# Altium PCB TEG_ver4_PCB1.PcbDoc
Units mil, origin at the board's own origin, x right, y up, seen from the top; angles counter-clockwise.
Board outline 1740.03 x 890.03 mil, 2 copper layers (Top Layer, Bottom Layer); 12 components, 13 nets, 44 pads, 0 vias.
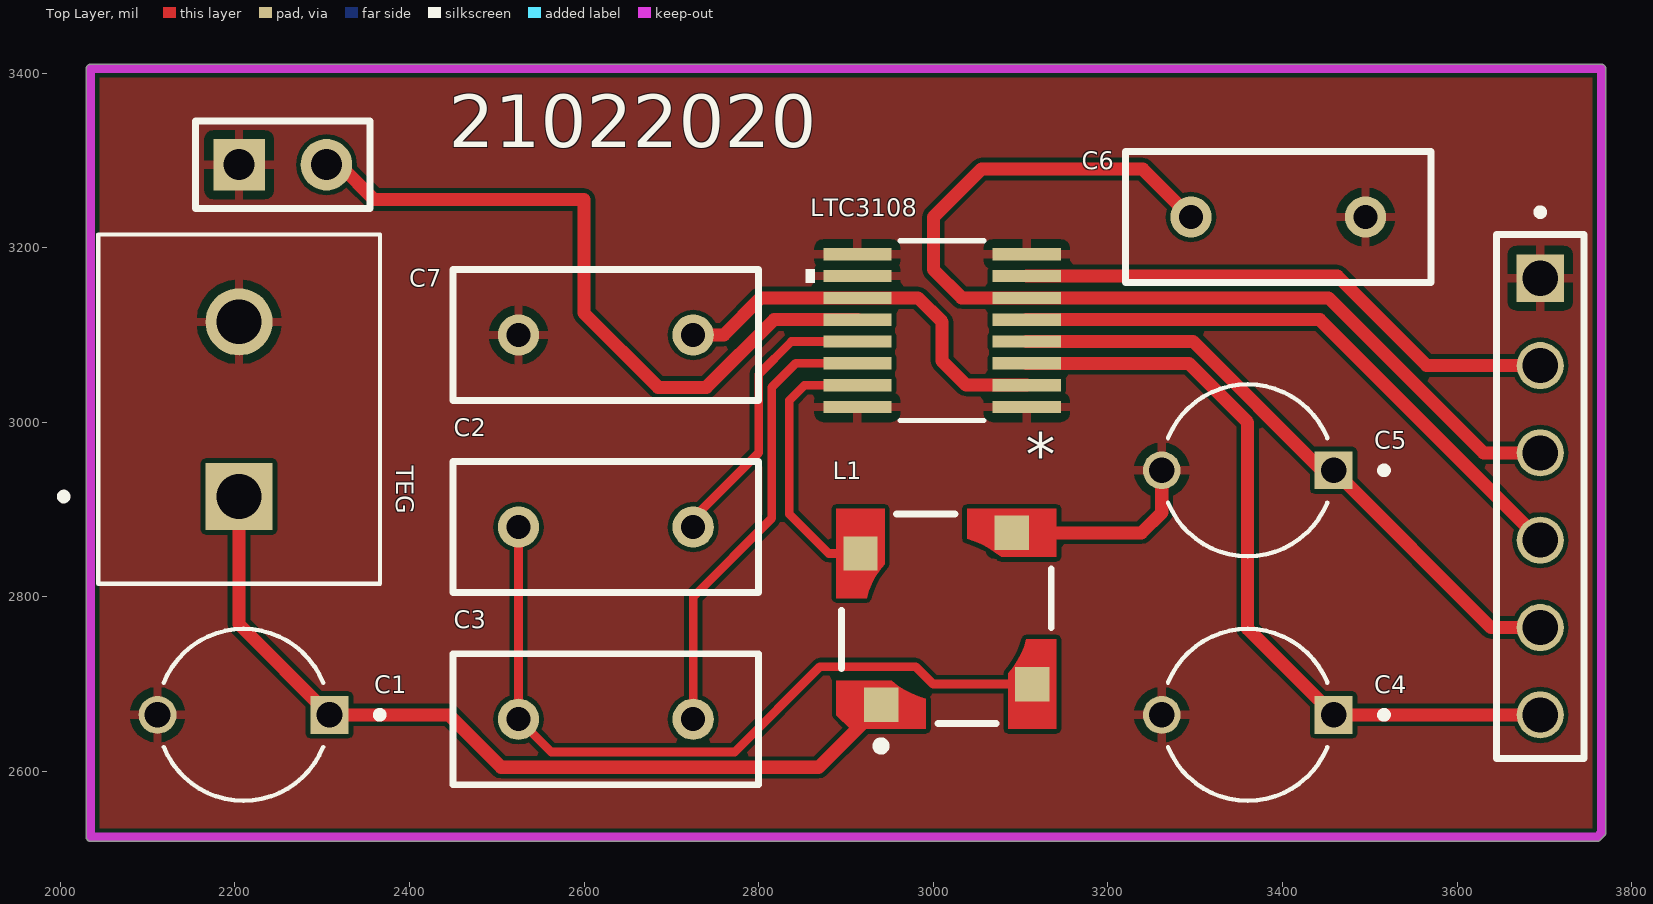
[diagram p0: Top Layer view]
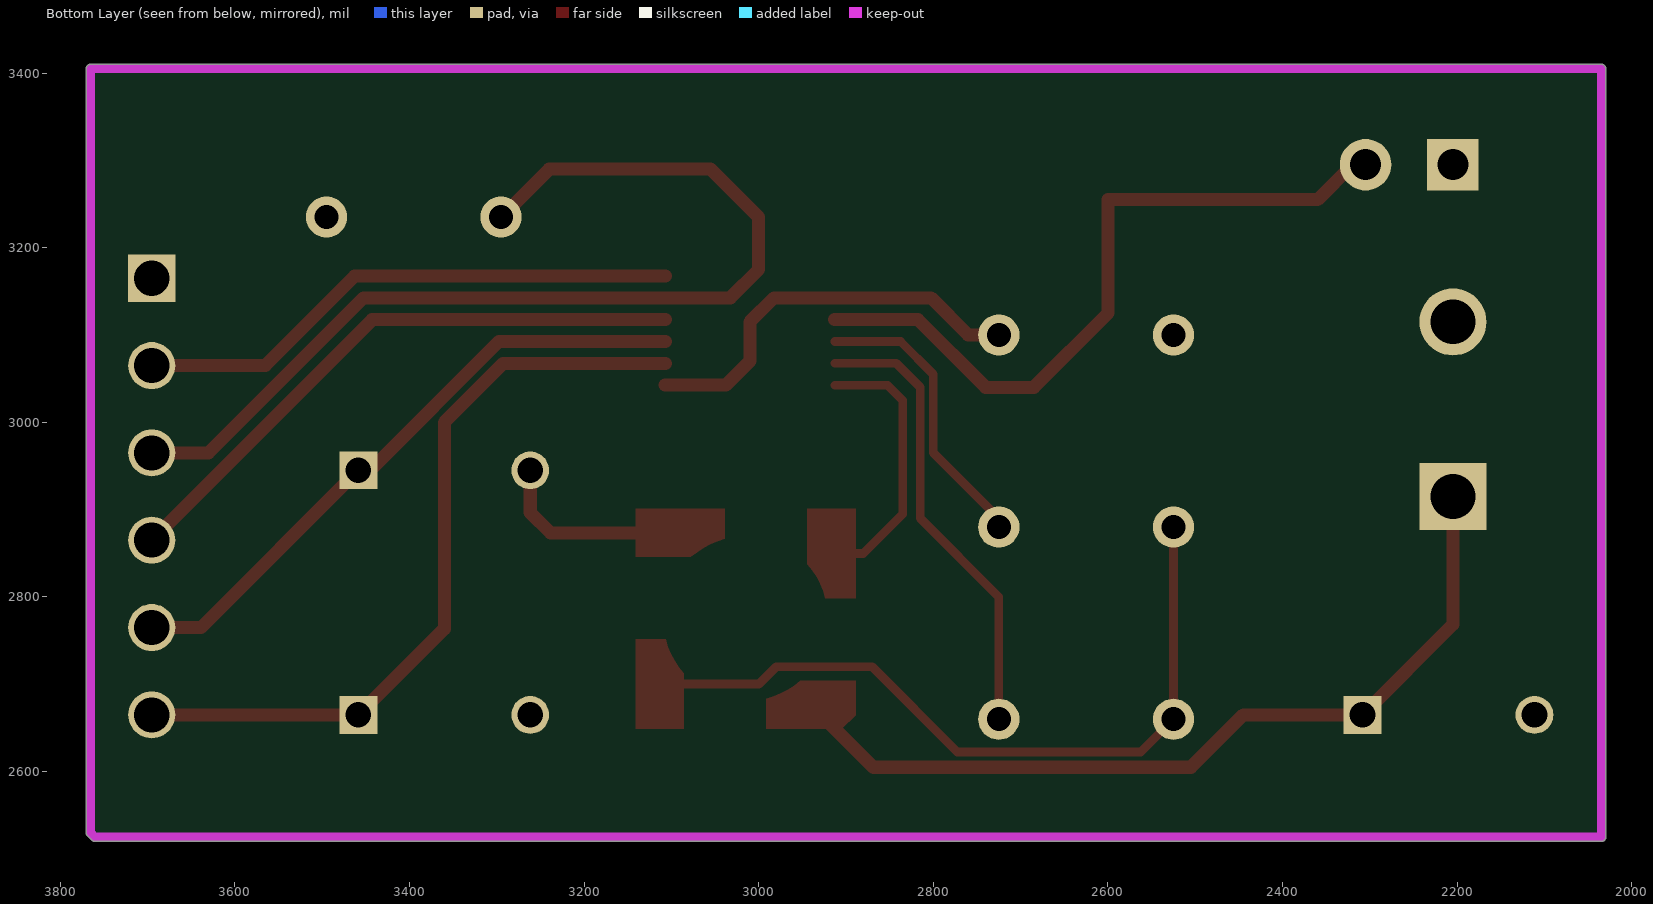
[diagram p1: Bottom Layer view, seen from below]
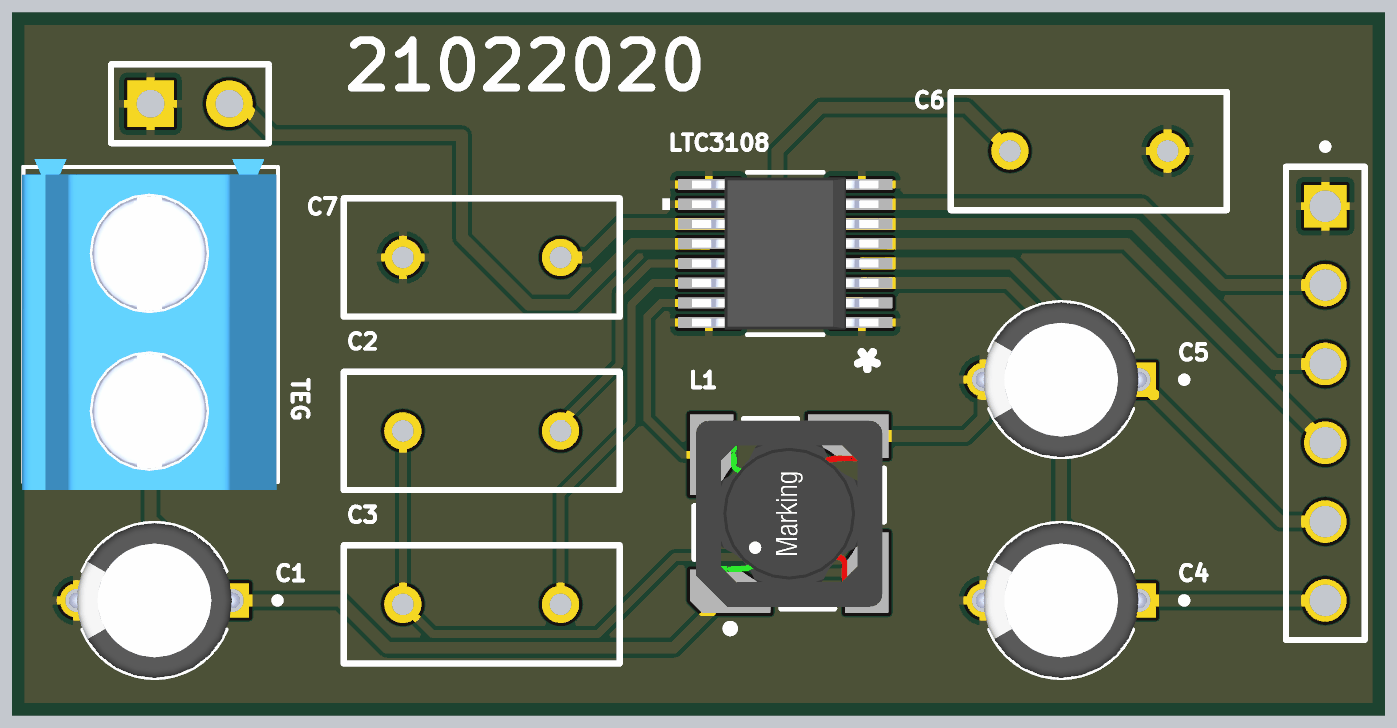
[diagram p2: 3D render of the assembled board from above, using the file's embedded part models]

## Layer stack, top to bottom
Top Solder: solder mask 0.4, Solder Resist, Dk 3.5
Top Layer: signal copper 1.4
Dielectric 1: dielectric 12.6, FR-4, Dk 4.8
Bottom Layer: signal copper 1.4
Bottom Solder: solder mask 0.4, Solder Resist, Dk 3.5

## Board outline
2035,2519.99 cw(c2035,2525) 2029.98,2525 2029.98,3405 cw(c2035,3405) 2035,3410.01 3765,3410.01 cw(c3765,3405) 3770.01,3405 3770.01,2530 cw(c3765,2530) 3768.53,2526.44 3768.55,2526.45 3763.55,2521.45 3763.56,2521.47 cw(c3760,2525) 3760,2519.99

## Design rules (kind name [scope] priority, off if disabled: settings)
Clearance [All] p1: gap=5 ignorepadtopadclearanceinfootprint=FALSE
PolygonConnect [All] p1: connectstyle=Relief reliefconductorwidth=10 reliefentries=4 polygonreliefangle="90 Angle" airgapwidth=10
RoutingVias [All] p1: holewidth=28 width=50 viastyle="Through Hole" minholewidth=28 minwidth=50 maxholewidth=28 maxwidth=50
SolderMaskExpansion [All] p1: expansion=4
Width signals [InNetClass('signals')] p1: maxlimit=10 minlimit=10 preferedwidth=10
Width power [InNetClass('power')] p2: maxlimit=15 minlimit=10 preferedwidth=15
30 further rules are at their usual default settings.

## Classes and differential pairs
net class signals: C1 C2 NetC2_1 SW
net class power: GND IN PGD VAUX VLDO VOUT VOUT2 VOUT2_EN VSTORE
component class TEG_ver4_sheet1: C1 C2 C3 C4 C5 C6 C7 L1 LTC3108 TEG

## Components (designator, comment, footprint, x,y, rotation, side; value= is the part's Value field where it differs from the comment)
C1 "220uF" CAPPRD500W50D500H1100 2210,2665 r180 top
C2 "Cap" RAD-0.2 2625,2880 r0 top value=1nF
C3 "Cap" RAD-0.2 2625,2660 r0 top value=330pF
C4 "220uF" CAPPRD500W50D500H1100 3360,2665 r180 top
C5 "220uF" CAPPRD500W50D500H1100 3360,2945 r180 top
C6 "Cap" RAD-0.2 3395,3235 r0 top value=2.2uF
C7 "Cap" RAD-0.2 2625,3100 r180 top value=2.2uF
J1 "Header 2" HDR1X2 2205,3295 r0 top
J2 "MTSW-106-09-G-S-250" SAMTEC_MTSW-106-09-G-S-250 3695,2915 r90 top
L1 "7µH / 70000µH" WE-EHPI_5838 3015,2775 r90 top
LTC3108 "LTC3108IGN#PBF" SSOP-16_GW 3010,3105 r180 top
TEG "TB006-508-02BE" CUI_TB006-508-02BE 2205,2915 r90 top

## Footprints (in the part's own frame and the unit in brackets; to place one, negate y for a bottom-side part, rotate by r counter-clockwise, add the part's x,y. Pads: shape width x height; smd on the part's side, far side on the other; paste and mask are expansions set on the pad)
CAPPRD500W50D500H1100 [mm]
  round 1.1 hole 0.75: N(2.5,0)
  rect 1.1x1.1 hole 0.75: P(-2.5,0)
  silkscreen extent -4.06,-2.5 2.32,2.5, body extent -2.75,-2.5 2.75,2.5, height 11
CUI_TB006-508-02BE [mm]
  rect 1.95x1.95 / inner round 1.95 / far side rect 1.95x1.95 hole 1.3: 1(0,0)
  round 1.95 hole 1.3: 2(5.08,0)
  silkscreen extent -2.54,-4.1 7.62,5.2, body extent -2.79,-4.06 7.87,4.14, height 10
HDR1X2 [mm] "Connector; Header; 2 Position"
  rect 1.5x1.5 hole 0.9: 1(0,0)
  round 1.5 hole 0.9: 2(2.54,0)
  silkscreen extent -1.27,-1.27 3.81,1.27
RAD-0.2 [mm] "Radial Cap, Thru-Hole; 2 Leads; 0.2 in Pin Spacing"
  round 1.2 hole 0.7: 1(-2.54,0) 2(2.54,0)
  silkscreen extent -4.44,-1.91 4.44,1.91
SAMTEC_MTSW-106-09-G-S-250 [mm]
  rect 1.37x1.37 / inner round 1.37 / far side rect 1.37x1.37 hole 1.02: 01(6.35,0)
  round 1.37 hole 1.02: 02(3.81,0) 03(1.27,0) 04(-1.27,0) 05(-3.81,0) 06(-6.35,0)
  silkscreen extent -7.62,-1.27 8.37,1.27
SSOP-16_GW [mil]
  rect 78x14 smd: 1(-97,87.5) 2(-97,62.5) 3(-97,37.5) 4(-97,12.5) 5(-97,-12.5) 6(-97,-37.5) 7(-97,-62.5) 8(-97,-87.5) 9(97,-87.5) 10(97,-62.5) 11(97,-37.5) 12(97,-12.5) 13(97,12.5) 14(97,37.5) 15(97,62.5) 16(97,87.5)
  silkscreen extent -48,-103 156,103, body extent -118,-96 118,96, height 69
WE-EHPI_5838 [mm] "Power Inductor 4-Leads, SMD, Body 6x6mm"
  rect 1x1 smd paste-403.566 mask-403.566: 1(-2.5,1.9) 2(1.9,2.5) 3(2.5,-1.9) 4(-1.9,-2.5)
  Top Layer region: -3.2,0.6 -3.2,2.8 -2.8,3.2 -1.8,3.2 -1.8,1.588 -1.8,1.587 -2.12,1.125 -2.324,0.6 -2.324,0.6 -2.324,0.6
  Top Layer region: -0.6,-3.2 -3.2,-3.2 -3.2,-1.8 -1.588,-1.8 -1.125,-2.12 -0.6,-2.324 -0.6,-2.324
  Top Layer region: 3.2,-0.6 3.2,-3.2 1.8,-3.2 1.8,-1.588 2.12,-1.125 2.324,-0.6 2.324,-0.6
  Top Layer region: 0.6,3.2 3.2,3.2 3.2,1.8 1.588,1.8 1.125,2.12 0.6,2.324 0.6,2.324
  silkscreen extent -3.82,-3.05 3.05,3.05, body extent -3,-3 3,3, height 4

## Part data
C1 C4 C5: library part EEUFS0J221B, "Aluminum Electrolytic Capacitors, 220uF, 6.3V, -40 to 105C", Package="RADIAL-2 Panasonic", =220uF, Availability="In Stock", Check_prices=https://www.snapeda.com/parts/EEUFS0J221B/Panasonic/view-part/5796863/?ref=eda, MF=Panasonic, MP=EEUFS0J221B, Price=None, Purchase-URL=https://pricing.snapeda.com/search/part/EEUFS0J221B/?ref=eda, SnapEDA_Link=https://www.snapeda.com/parts/EEUFS0J221B/Panasonic/view-part/5796863/?ref=snap
C2 C3 C6 C7: "Capacitor", LatestRevisionDate=17-Jul-2002, LatestRevisionNote="Re-released for DXP Platform.", PackageDescription="Radial Cap, Thru-Hole; 2 Leads; 0.3 in Pin Spacing", PackageReference=RAD-0.3, Published=8-Jun-2000, Publisher="Altium Limited"
J1: "Header, 2-Pin", LatestRevisionDate=17-Jul-2002, LatestRevisionNote="Re-released for DXP Platform.", Publisher="Altium Limited"
J2: Package=None, Availability=Unavailable, MP=MTSW-106-09-G-S-250, Price=None
L1: library part 74488540070, "WE-EHPI SMT Energy Harvesting Coupled Inductor, size 5838, 7µH / 70000µH, 1:100, 1.9A", Case/Size Code=5838, DC Resistance 1=0.085O, DC Resistance 2=205O, DC Resistance Max 1=0.095O, DC Resistance Max 2=240O, Inductance 1=7µH, Inductance 2=70000µH, Manufacturer="Wurth Elektronik", Operating Temperature Max=125°C, Operating Temperature Min=-40°C, Rated Current=1.9A, Saturation Current=1.3A, Category="Coupled Power Inductors", ComponentLink1Description="Website Link", ComponentLink1URL=https://www.we-online.com/redexpert/article/74488540070?ad, ComponentLink2Description="Datasheet Link", ComponentLink2URL=https://www.we-online.com/redexpert/spec/74488540070?ad, Height=4mm, Length=6mm, Manufacturer Part Number=74488540070, Match Code=WE-EHPI, Mount="Surface Mount", Packaging="Tape and Reel", Turns Ratio=1:100, Width=6mm
LTC3108: "LTC3108 - Ultralow Voltage Step-Up Converter and Power Manager", Package="SSOP-16 Linear Technology", Check_prices=https://www.snapeda.com/parts/LTC3108IGN%23PBF/Analog+Devices/view-part/?ref=eda, MF="Analog Devices", MP=LTC3108IGN#PBF, SnapEDA_Link=https://www.snapeda.com/parts/LTC3108IGN%23PBF/Analog+Devices/view-part/?ref=snap
TEG: "2~24 Poles, Screw Type, Horizontal, 5.08 Pitch, 26~14 (AWG), Terminal Block Connector", Package=None, Check_prices=https://www.snapeda.com/parts/TB006-508-02BE/Same+Sky/view-part/?ref=eda, MF="Same Sky", MP=TB006-508-02BE, SnapEDA_Link=https://www.snapeda.com/parts/TB006-508-02BE/Same+Sky/view-part/?ref=snap

## Nets (pads, with @x,y where several pads share a name; then routed paths per layer and width w, separated by ;. In a path a pad name is that pad's centre, name@x,y a point inside that pad or via, vN(x,y) a via of type N, cw(c..) or ccw(c..) an arc to the next point about the centre after c; other vN are vias at no path point)
C1: C2.2 LTC3108.13 | length 334.6
  Top Layer w10: C2.2 2725,2890 2800,2965 2800,3055 2837.5,3092.5 LTC3108.13
C2: C3.2 LTC3108.14 | length 526.7
  Top Layer w10: C3.2 2725,2800 2815,2890 2815,3040 2842.5,3067.5 LTC3108.14
GND: C1.N C4.N C5.N C6.2 C7.2 J1.1 J2.01 L1.3 LTC3108.1 LTC3108.8 LTC3108.9 LTC3108.10 LTC3108.16 TEG.2 | length 229.8
  Top Layer w15: L1.3 3238.43,2873.43 3261.57,2896.57 C5.N
IN: C1.P L1.1 TEG.1 | length 994.1
  Top Layer w15: TEG.1@2205,2930 TEG.1 2205,2768.43 C1.P 2445,2665 2505,2605 2868.62,2605 L1.1
NetC2_1: C2.1 C3.1 L1.4 | length 872.5
  Top Layer w10: C2.1 C3.1 2562.5,2622.5 2772.5,2622.5 2870,2720 2980,2720 2999.8,2700.2 L1.4
PGD: J2.02 LTC3108.7 | length 630.5
  Top Layer w15: LTC3108.7 3462.5,3167.5 3565,3065 J2.02
SW: L1.2 LTC3108.15 | length 315.5
  Top Layer w10: LTC3108.15 2852.5,3042.5 2835,3025 2835,2895 2880.2,2849.8 L1.2
VAUX: C7.1 LTC3108.2 LTC3108.11 | length 467.4
  Top Layer w15: C7.1 2760,3100 2802.5,3142.5 LTC3108.11 2982.5,3142.5 3010,3115 3010,3070 3037.5,3042.5 LTC3108.2
VLDO: C6.1 J2.03 LTC3108.6 | length 1182.5
  Top Layer w15: C6.1 3240,3290 3055,3290 3000,3235 3000,3175 3032.5,3142.5 LTC3108.6 3452.5,3142.5 3630,2965 J2.03
VOUT: C5.P J2.05 LTC3108.4 | length 723.7
  Top Layer w15: LTC3108.4 3297.5,3092.5 3445,2945 C5.P 3638.43,2765 J2.05
VOUT2: J2.04 LTC3108.5 | length 692.6
  Top Layer w15: LTC3108.5 3442.5,3117.5 J2.04
VOUT2_EN: J1.2 LTC3108.12 | length 831.9
  Top Layer w15: J1.2@2305,3305 J1.2 2320,3295 2360,3255 2600,3255 2600,3125 2685,3040 2740,3040 2817.5,3117.5 LTC3108.12
VSTORE: C4.P J2.06 LTC3108.3 | length 893.3
  Top Layer w15: LTC3108.3 3292.5,3067.5 3360,3000 3360,2763.43 C4.P J2.06

## Polygon pours and split planes (outlines as drawn)
GND on Top Layer "GND" (solid, pour order 4): 2035,3405 3765,3405 3765,2530 3760,2525 2035,2525

## Keep-outs
Keep-Out Layer:
  lines w10: 2035,2525 2035,3405 3765,3405 3765,2530 3760,2525 2035,2525

## Silkscreen, mask and mechanical layers (free items; w line width, h text height)
Top Overlay:
  text "21022020" at 2445,3315 h60

## Text inside footprints (layer, text, board x,y; h text height)
LTC3108: Top Overlay "*" at 3140,3009 h50 r180; Mechanical 13 "*" at 3096,3060 h50 r180